# EAGLE board Extender_Jumper (EAGLE 9.6.2)
REV: A
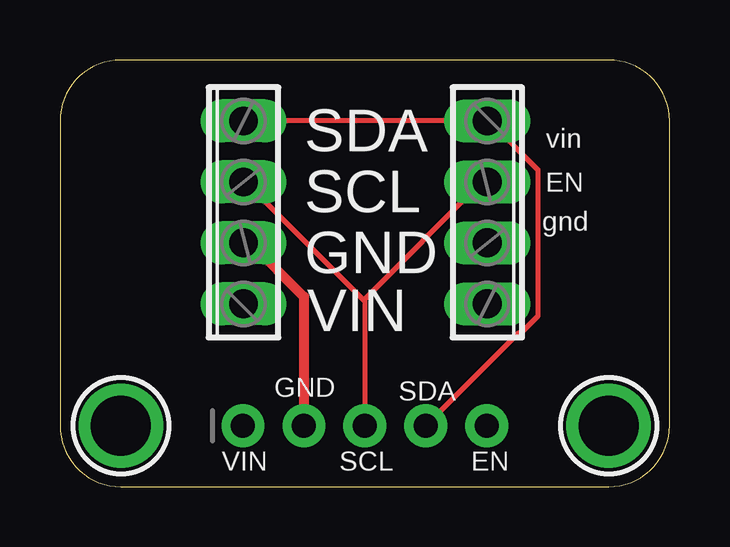
[diagram p0: board, top side]
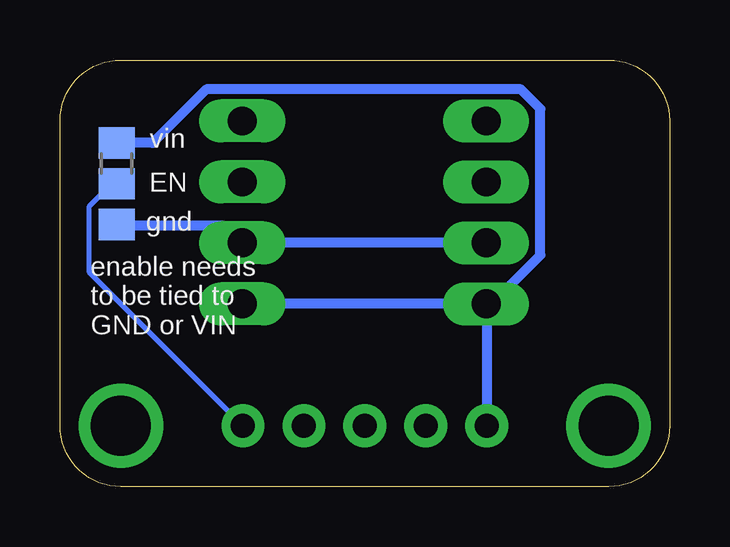
[diagram p1: board, bottom side, seen from below]

Size 25.4 x 17.78 mm. Coordinates in mm from the lower left corner, seen from the top.
Outline: 0,15.24 0,2.54 arc90 2.54,0 22.86,0 arc90 25.4,2.54 25.4,15.24 arc90 22.86,17.78 2.54,17.78 arc90 0,15.24
Copper layers (1*16): Top 0.035mm / dielectric 1.5mm / Bottom 0.035mm
Design rules "adafruit *": minimum track width 8mil, minimum drill 15.5mil, track to track 8mil, track to pad 8mil, pad to pad 8mil, via to via 8mil, smd to smd 8mil, copper to edge 10mil, drill to drill 8mil, minimum pad ring 10mil, minimum via ring 8mil, stop-mask expansion 2mil, vias tented up to drill 20mil, thermal gap 10mil
Net classes: 1 highpower: width 0.406 mm, drill 0.483 mm; 2 lowpower: width 0.305 mm, drill 0.483 mm

## Footprints (pad centres in the part's own frame; a part is rotated, then mirrored left to right if it is on the bottom)
A0R-JMP = smd 1.5 x 1.3: 1 0,1.7; 2 0,0; 3 0,-1.7
1X05_ROUND_70 = drill 1 pad 1.778: 1 -5.08,0; 2 -2.54,0; 3 0,0; 4 2.54,0; 5 5.08,0
MOUNTINGHOLE_2.5_PLATED = drill 2.5 pad 3.2: P$1 0,0
4POL254 = drill 1.2 long: 1 -3.81,0; 2 -1.27,0; 3 1.27,0; 4 3.81,0

## Placement (x,y rotation side)
JMP1  0R-JUMPA  [A0R-JMP]  23.04,12.62 0 bottom
JP2  [1X05_ROUND_70]  12.7,2.54 0 top
U$19  MOUNTINGHOLE2.5  [MOUNTINGHOLE_2.5_PLATED]  2.54,2.54 0 top
U$21  MOUNTINGHOLE2.5  [MOUNTINGHOLE_2.5_PLATED]  22.86,2.54 0 top
X1  [4POL254]  7.65,11.43 90 top
X2  [4POL254]  17.81,11.43 270 top

## Library data of the parts
JMP1 = jump-0r-smd
JP2 = microbuilder
U$19 U$21 = microbuilder; BOM: EXCLUDE
X1 X2 = con-phoenix-254; OC_FARNELL: unknown; OC_NEWARK: unknown

## Nets
EN: JMP1.2 JP2.5
GND [highpower]: JMP1.3 JP2.2 X1.2 X2.3
SCL: JP2.3 X1.3 X2.2
SDA: JP2.4 X1.4 X2.1
VCC [highpower]: JMP1.1 JP2.1 X1.1 X2.4

## Tracks (layer width: path | path; a pad name or v marks a point on that pad's centre or on a via)
EN
  Bottom 0.203: JP2.5 24.18,8.94 24.18,11.68 23.27,12.6 23.06,12.6 JMP1.2
GND
  Top 0.406: JP2.2 10.16,7.92 7.92,10.16 X1.2
  Bottom 0.406: JMP1.3 22.96,10.87 18.59,10.87 17.88,10.16 X2.3 X1.2
SCL
  Top 0.203: JP2.3 12.7,7.72 12.65,7.77 | 12.65,7.77 7.72,12.7 X1.3 | X2.2 17.58,12.7 12.65,7.77
SDA
  Top 0.203: JP2.4 19.1,6.4 19.2,6.4 19.91,7.11 19.91,13.21 17.88,15.24 X2.1 X1.4
VCC
  Bottom 0.406: X1.1 7.42,7.62 5.38,9.65 5.38,15.75 6.2,16.56 19.3,16.56 21.54,14.33 22.96,14.33 JMP1.1 | JP2.1 7.62,7.52 X1.1 | X1.1 X2.4

## Text on the board
tPlace: GND | SDA | VIN | SCL | EN
tNames: SDA | vin | EN | SCL | gnd | GND | VIN
bNames: vin | EN | gnd | enable needs / to be tied to / GND or VIN